# Allegro board DA_CONVERTOR.brd
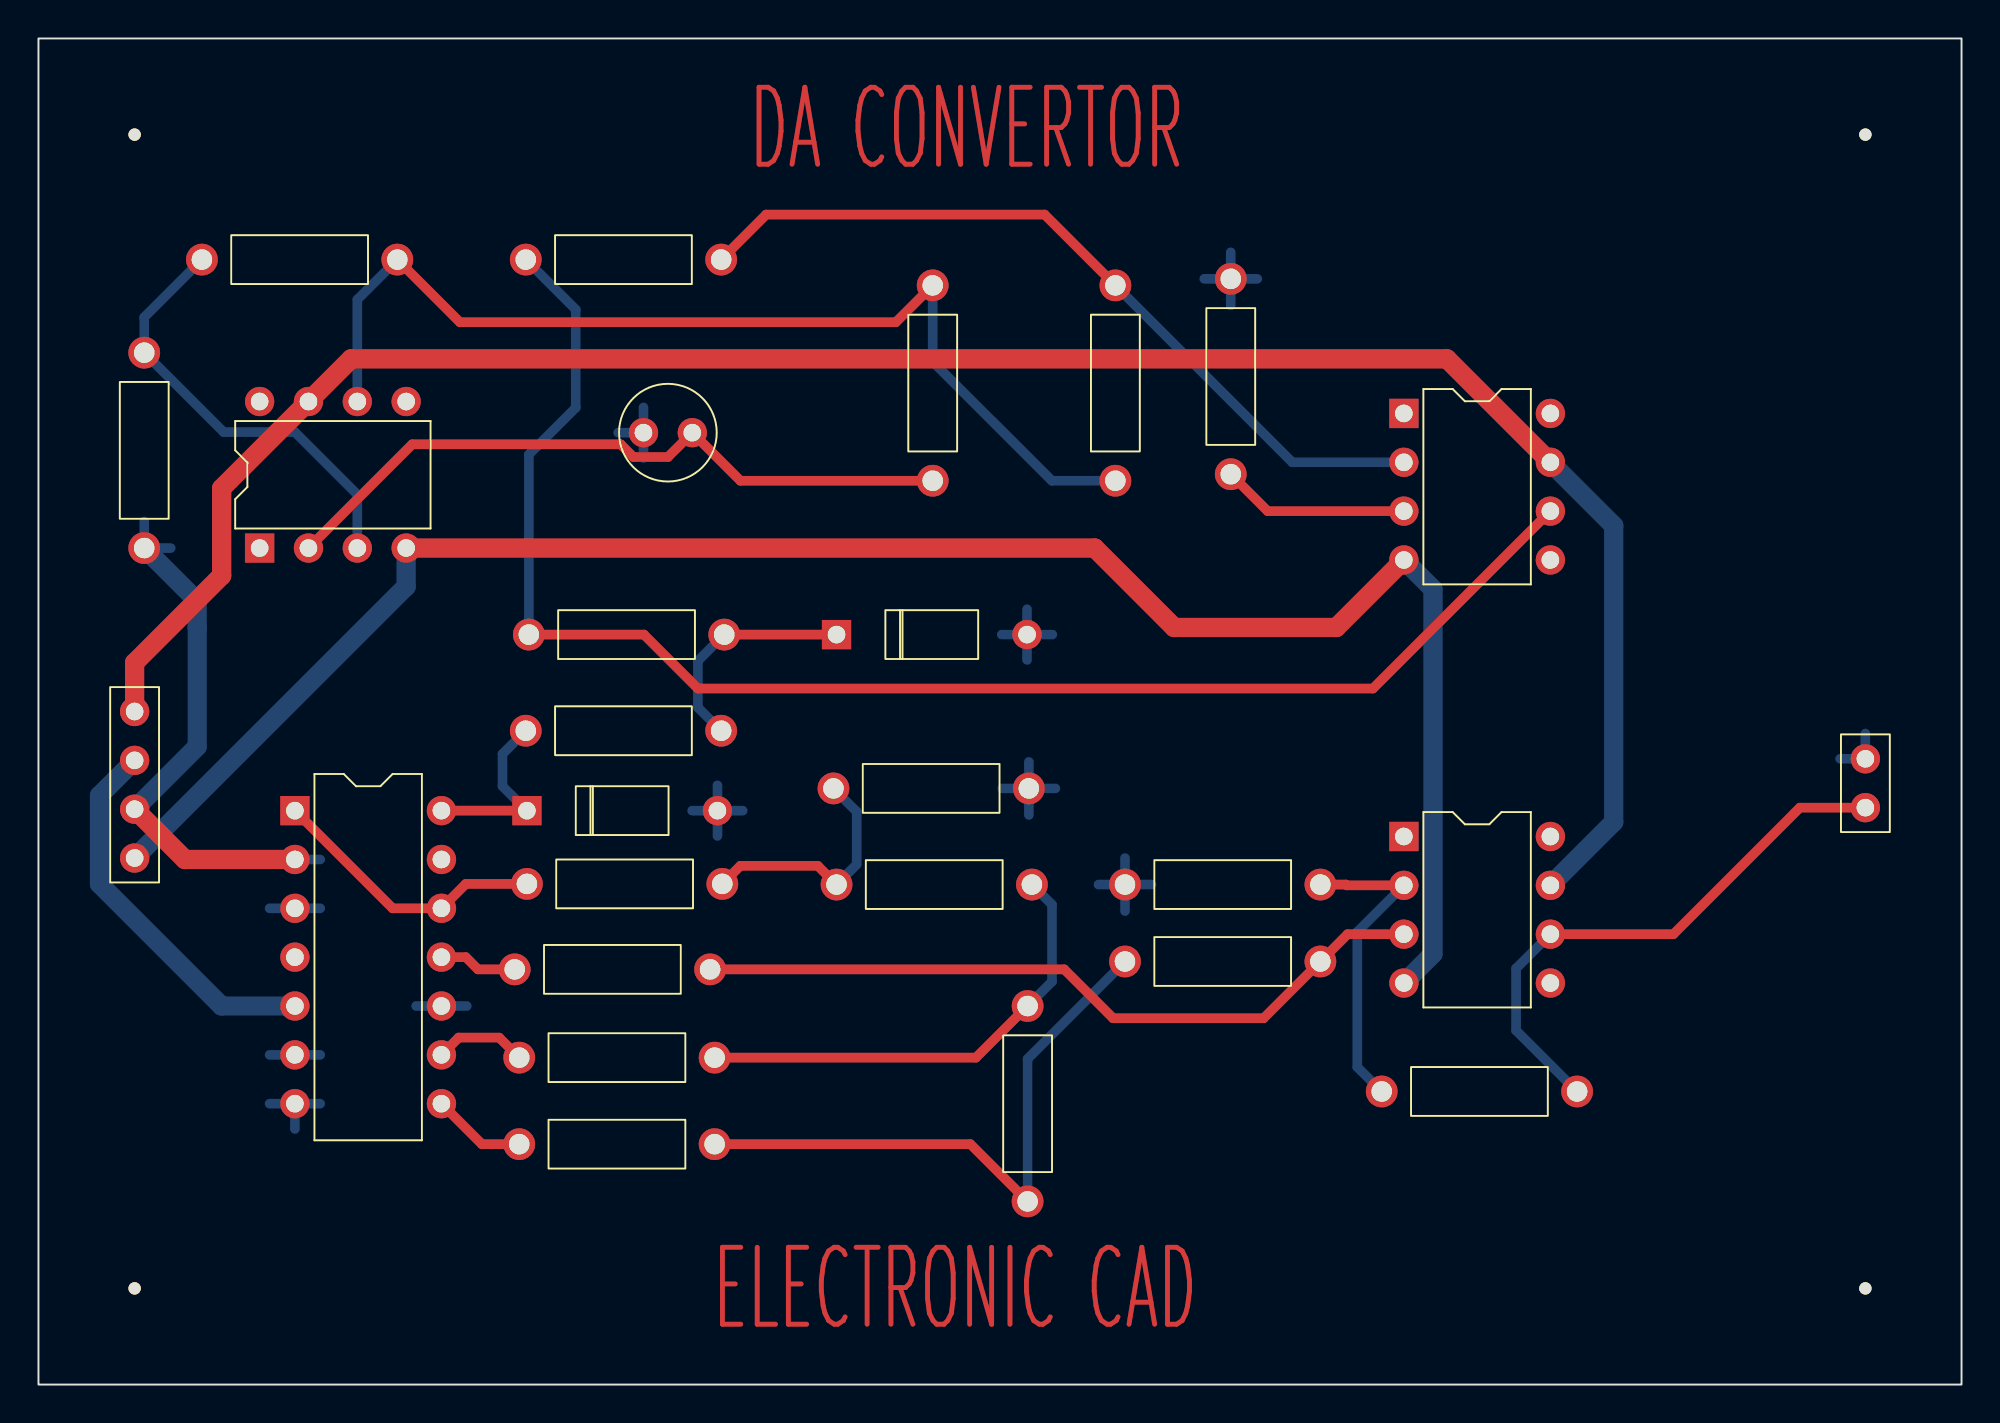
[diagram p0: board, top side]
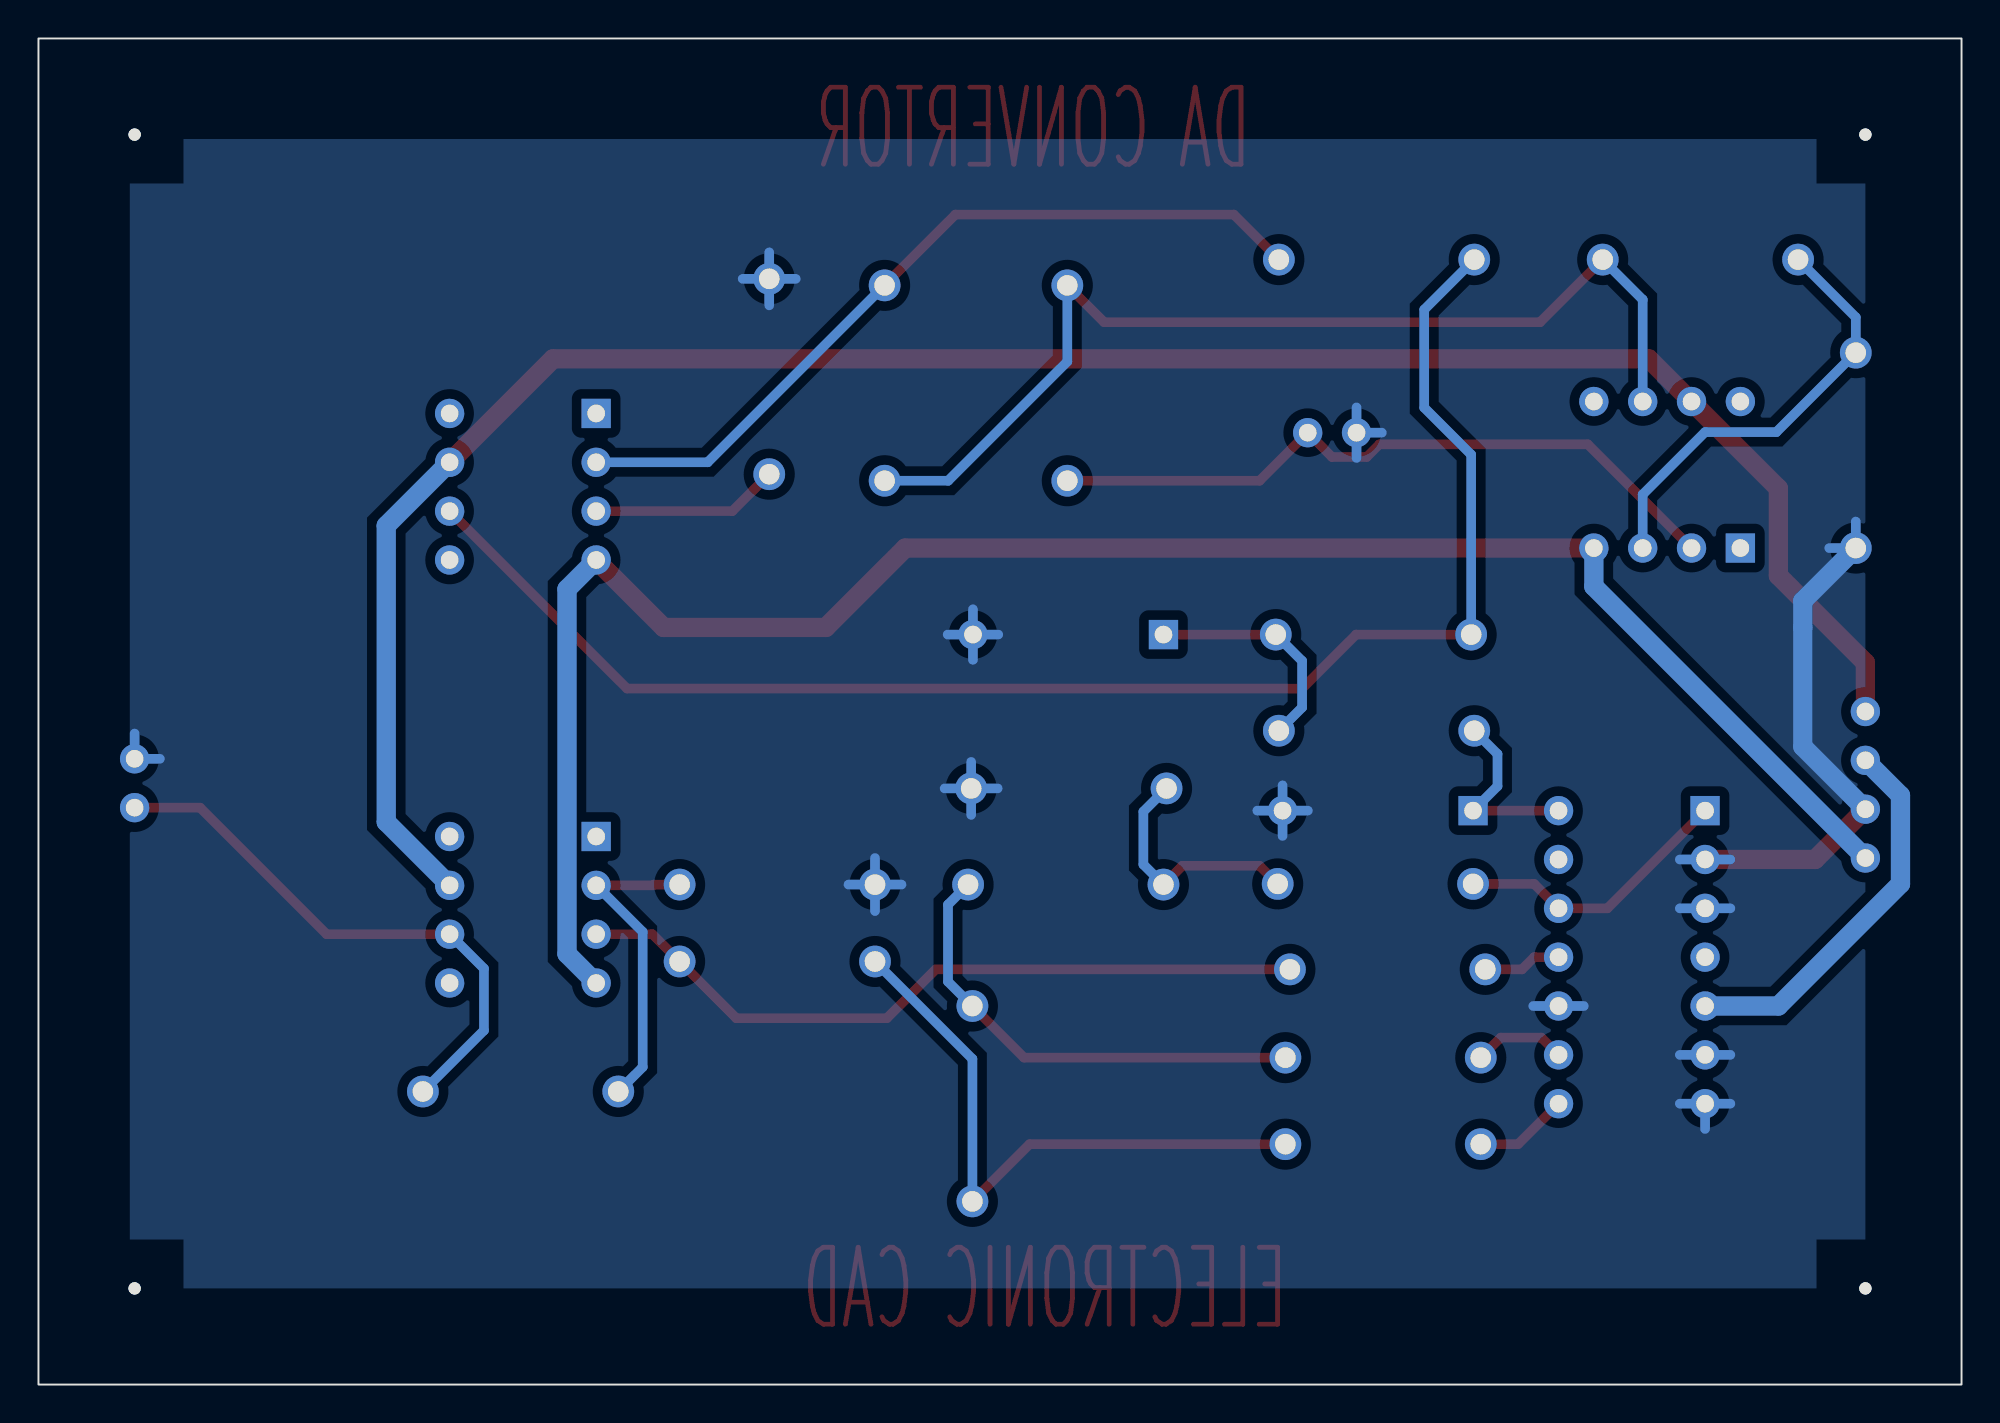
[diagram p1: board, bottom side, seen from below]

Outline 100 x 70 mm; copper layers: TOP, BOTTOM. Coordinates in mm from the lower left corner of the outline.
Outline path: rectangle 0,0 100,70

## Design rules (mm)
nets with their own width: min track width 0.5; nets CLK N00214 N00247 N00309 N00425 N00442 N00454 N00564 N00917 N01133 N01142 N01156 N01172 N01187 N01199 N01483 OUT SIG
nets with their own width: min track width 1; nets +5V +12V -12V GND

## Placement (name value [footprint] x y rotation side)
C1  0.1uF  [CAP196]  34 49.5 90 top
D1  1N4148  [DO41]  41.5 39 270 top
D2  RD 5.6A  [DO41]  25.4 29.84 270 top
J1  CON2  [JUMPER2]  95 30 90 top
J2  CON4  [JUMPER4]  5 35 270 top
NOREF  -  []  0 70 0 top
NOREF#2  -  [unnamed#2]  5 65 0 top
NOREF#3  -  []  100 0 90 top
NOREF#4  -  [unnamed#2]  5 5 0 top
NOREF#5  -  [unnamed#2]  95 5 0 top
NOREF#6  -  [unnamed#2]  95 65 0 top
R1  10k  [RES400]  46.5 47 0 top
R2  5.1k  [RES400]  35.5 58.5 90 top
R3  10k  [RES400]  56 47 0 top
R4  1k  [RES400]  25.5 39 270 top
R5  1k  [RES400]  35.5 34 90 top
R6  10k  [RES400]  62 57.5 180 top
R7  6.8k  [RES400]  8.5 58.5 270 top
R8  1k  [RES400]  5.5 43.5 0 top
R9  22k  [RES400]  24.77 21.59 270 top
R10  22k  [RES400]  69.85 15.24 270 top
R11  10k  [RES400]  56.5 22 270 top
R12  22k  [RES400]  25 12.5 270 top
R13  10k  [RES400]  51.44 19.68 180 top
R14  22k  [RES400]  25 17 270 top
R15  10k  [RES400]  41.5 26 270 top
R16  10k  [RES400]  56.5 26 270 top
R17  22k  [RES400]  25.4 26.04 270 top
R18  10k  [RES400]  51.5 31 90 top
U1  LM741  [DIP8_3]  11.5 43.5 90 top
U2  LM741  [DIP8_3]  71 50.5 0 top
U3  74LS90  [DIP14_3]  13.34 29.84 0 top
U4  LM741  [DIP8_3]  71 28.5 0 top

## Library data of the parts
C1 = CAP NP: Tolerance: ***; User Part Number: ***
D1 = DIODE
D2 = DIODE ZENER
J1 = CON2: User Part Number: ***
J2 = CON4: User Part Number: ***
R1-R18 = R: Tolerance: ***; User Part Number: ***
U1 U2 U4 = LM741_2: Tolerance: ***; User Part Number: ***
U3 = 74LS90_3: Tolerance: ***; User Part Number: ***

## Footprints (pads in the part's own frame, mm; a bottom-side part is the same pattern mirrored in y, then rotated)
CAP196
  round 1.524 hole 0.914: 1(0,0) 2(0,2.54)
DIP8_3
  rect 1.524x1.524 hole 0.914: 1(0,0)
  round 1.524 hole 0.914: 2(0,-2.54) 3(0,-5.08) 4(0,-7.62) 5(7.62,-7.62) 6(7.62,-5.08) 7(7.62,-2.54) 8(7.62,0)
DIP14_3
  rect 1.524x1.524 hole 0.914: 1(0,0)
  round 1.524 hole 0.914: 2(0,-2.54) 3(0,-5.08) 4(0,-7.62) 5(0,-10.16) 6(0,-12.7) 7(0,-15.24) 8(7.62,-15.24) 9(7.62,-12.7) 10(7.62,-10.16) 11(7.62,-7.62) 12(7.62,-5.08) 13(7.62,-2.54) 14(7.62,0)
DO41
  rect 1.524x1.524 hole 0.914: 1(0,0)
  round 1.524 hole 0.914: 2(0,9.906)
JUMPER2
  round 1.524 hole 0.914: 1(0,0) 2(2.54,0)
JUMPER4
  round 1.524 hole 0.914: 1(0,0) 2(2.54,0) 3(5.08,0) 4(7.62,0)
RES400
  round 1.651 hole 1.067: 1(0,0) 2(0,10.16)
unnamed#2
  round 0.635 hole 3.175 unplated: (0,0)

## Nets
+5V: J2.2 U3.5
+12V: J2.1 U1.7 U2.7 U4.7
-12V: J2.4 U1.4(V-) U2.4(V-) U4.4(V-)
GND: C1.2 D1.2 D2.2 J1.2 J2.3 R6.1 R8.1 R16.1 R18.1 U3.2 U3.3 U3.6 U3.7(R92) U3.10
CLK: D2.1(CATHODE) R5.2 U3.14
OUT: J1.1 R10.2 U4.6
SIG: R9.2 R11.2 U4.3
N00214: C1.1 R1.1 U1.2
N00247: R7.1 R8.2 U1.3
N00309: R1.2 R3.1 R7.2 U1.6
N00425: R2.1 R3.2 U2.2
N00442: R2.2 R4.1 U2.6
N00454: R6.2 U2.3
N00564: D1.1(K) R4.2 R5.1
N00917: R17.1 U3.1 U3.12
N01133: R15.1 R17.2 R18.2
N01142: R13.1 R14.2 R15.2
N01156: R11.1 R12.2 R13.2
N01172: R9.1 U3.11
N01187: R12.1 U3.8
N01199: R14.1 U3.9
N01483: R10.1 R16.2 U4.2

Pads without a net: U1 1 5 8; U2 1 5 8; U3 4 13; U4 1 5 8

## Routing (per net, layer and track width the routed paths; a pad name or vN(x,y) marks a point on that pad's centre or on a via; arc(x,y) is an arc through that point)
+5V: length 20
  BOTTOM w1: J2.2 3.17,30.64 3.17,26.04 9.53,19.68 U3.5
+12V: length 112.3
  TOP w1: J2.1 5,37.54 9.53,42.06 9.53,46.6 U1.7 16.26,53.34 73.24,53.34 U2.7
  BOTTOM w1: U4.7 81.92,29.25 81.92,44.66 U2.7
-12V: length 100.3
  TOP w1: U1.4 54.93,43.5 59.06,39.37 67.49,39.37 U2.4
  BOTTOM w1: J2.4 19.12,41.5 U1.4 ; U4.4 72.52,22.4 72.52,41.36 U2.4
GND: length 76.4
  TOP w1: U3.2 7.62,27.3 J2.3
  BOTTOM w0.5: 62,56.12 R6.1 ; R6.1 62,58.88 ; R6.1 60.62,57.5 ; R6.1 63.38,57.5 ; 12.02,14.61 U3.7 ; U3.7 14.65,14.61 ; U3.7 13.34,13.29 ; 51.5,29.62 R18.1 ; R18.1 52.88,31 ; R18.1 50.12,31 ; R18.1 51.5,32.38 ; 56.5,24.62 R16.1 ; R16.1 57.88,26 ; R16.1 56.5,27.38 ; R16.1 55.12,26 ; 12.02,24.77 U3.3 14.65,24.77 ; 33.99,29.84 D2.2 ; D2.2 36.62,29.84 ; D2.2 35.31,31.16 ; D2.2 35.31,28.53 ; 19.64,19.68 U3.10 22.27,19.68 ; 50.09,39 D1.2 ; D1.2 51.41,40.31 ; D1.2 51.41,37.69 ; D1.2 52.72,39 ; 5.5,44.88 R8.1 6.88,43.5 ; C1.2 31.46,50.81 ; C1.2 31.46,48.19 ; C1.2 30.14,49.5 ; 14.65,17.14 U3.6 12.02,17.14 ; 93.69,32.54 J1.2 95,33.85 ; 14.65,27.3 U3.2 12.02,27.3
  BOTTOM w1: R8.1 8.26,40.74 8.26,33.17 J2.3
CLK: length 9.6
  TOP w0.5: U3.14 D2.1
  BOTTOM w0.5: R5.2 24.13,32.79 24.13,31.11 D2.1
OUT: length 29.3
  TOP w0.5: U4.6 85.02,23.42 91.59,30 J1.1
  BOTTOM w0.5: U4.6 76.83,21.64 76.83,18.41 R10.2
SIG: length 38.9
  TOP w0.5: U4.3 68.08,23.42 R11.2 63.71,19.05 55.88,19.05 53.34,21.59 R9.2
N00214: length 36.5
  TOP w0.5: R1.1 36.5,47 C1.1 32.73,48.23 30.93,48.23 30.27,48.9 19.43,48.9 U1.2
N00247: length 23
  BOTTOM w0.5: R7.1 5.5,55.5 R8.2 9.63,49.53 13.34,49.53 16.58,46.28 U1.3
N00309: length 54.3
  TOP w0.5: R1.2 44.59,55.24 21.91,55.24 R7.2
  BOTTOM w0.5: R7.2 16.58,56.42 U1.6 ; R1.2 46.5,53.2 52.7,47 R3.1
N00425: length 41.8
  TOP w0.5: R2.1 37.84,60.84 52.32,60.84 R3.2
  BOTTOM w0.5: R3.2 65.2,47.96 U2.2
N00442: length 79.7
  TOP w0.5: R4.1 31.48,39 34.29,36.2 69.39,36.2 U2.6
  BOTTOM w0.5: R2.2 27.94,55.9 27.94,50.8 25.5,48.36 R4.1
N00454: length 9.8
  TOP w0.5: U2.3 63.92,45.42 R6.2
N00564: length 11.9
  TOP w0.5: R4.2 D1.1
  BOTTOM w0.5: R4.2 34.29,37.63 34.29,35.21 R5.1
N00917: length 14.7
  TOP w0.5: U3.1 18.41,24.77 U3.12 22.23,26.04 R17.1
N01133: length 12.7
  TOP w0.5: R15.1 40.52,26.98 36.5,26.98 R17.2
  BOTTOM w0.5: R15.1 42.55,27.05 42.55,29.8 R18.2
N01142: length 24.7
  TOP w0.5: R14.2 48.75,17 R13.1
  BOTTOM w0.5: R15.2 52.7,24.95 52.7,20.95 R13.1
N01156: length 32.1
  TOP w0.5: R12.2 48.46,12.5 R13.2
  BOTTOM w0.5: R13.2 51.44,16.93 R11.1
N01172: length 4.1
  TOP w0.5: U3.11 22.22,22.23 22.86,21.59 R9.1
N01187: length 4.9
  TOP w0.5: U3.8 23.06,12.5 R12.1
N01199: length 4.8
  TOP w0.5: R14.1 23.96,18.04 21.85,18.04 U3.9
N01483: length 16.6
  TOP w0.5: U4.2 68.03,25.96 67.99,26 R16.2
  BOTTOM w0.5: U4.2 68.58,23.54 68.58,16.51 R10.1

## Copper pours and planes (outline as drawn; the poured copper is in the pictures)
GND on BOTTOM: 5,5 5,64.77 95.25,64.77 95.25,5

## Text on the board
TOP: ELECTRONIC CAD | DA CONVERTOR
DIMENSION: FIGURE | FINISHED_SIZE | 0.914 | 1.067 | 3.175 | DRILL CHART: TOP to BOTTOM | ALL UNITS ARE IN MILLIMETERS | PLATED | NON-PLATED | QTY | 50 | 36 | 4
